# Altium PCB 14语音模块OK.PcbDoc
Units mil, origin at the board's own origin, x right, y up, seen from the top; angles counter-clockwise.
Board outline 1168.96 x 939.54 mil, 2 copper layers (Top Layer, Bottom Layer); 3 components, 11 nets, 24 pads, 21 vias.
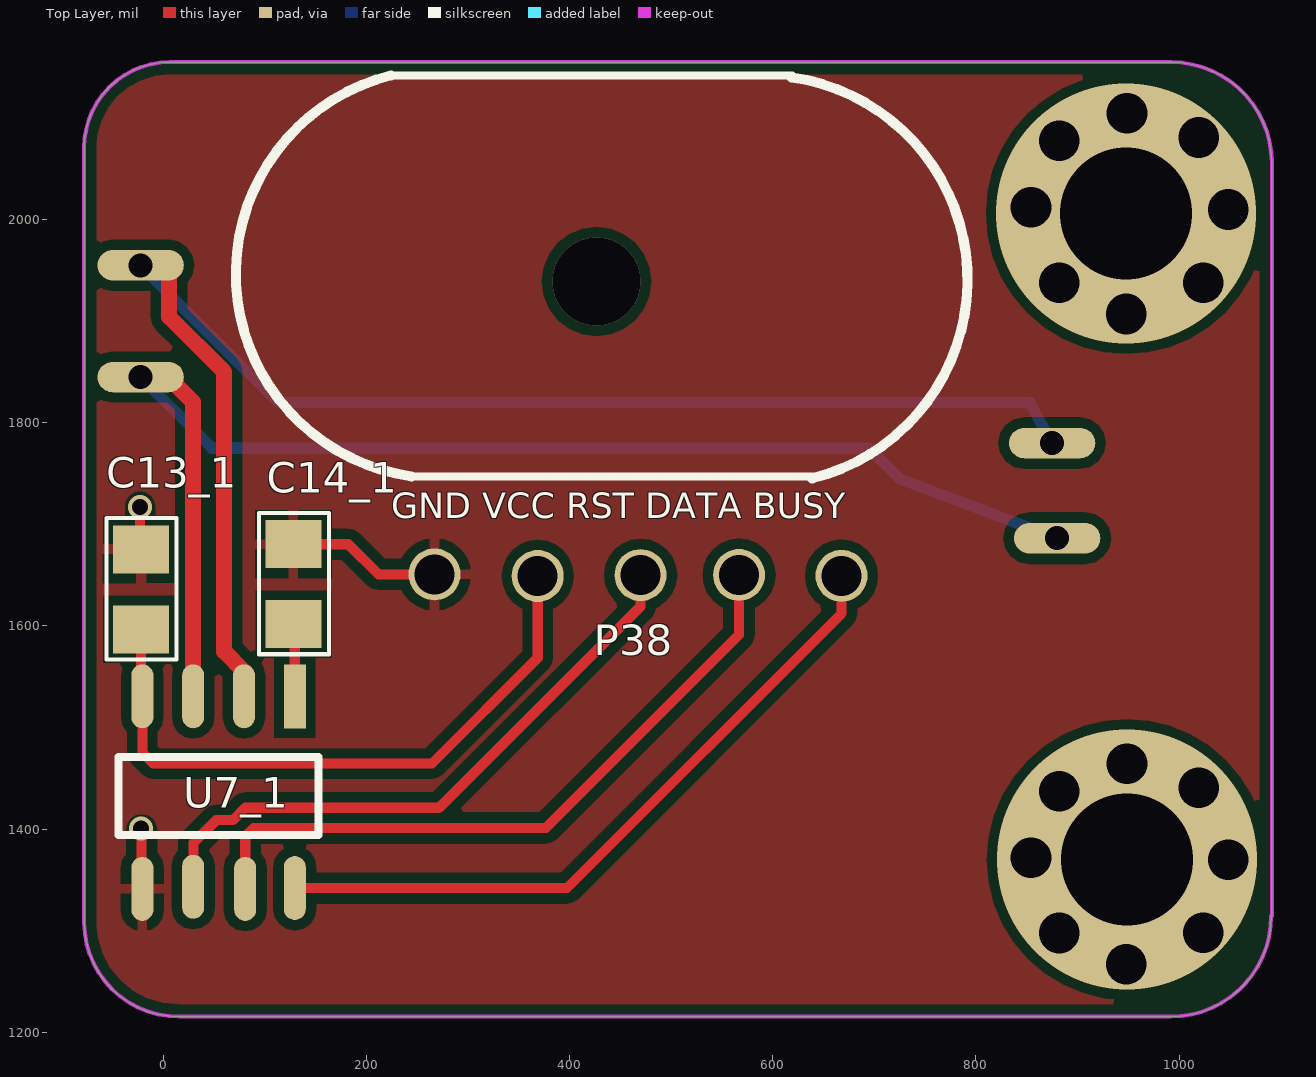
[diagram p0: Top Layer view]
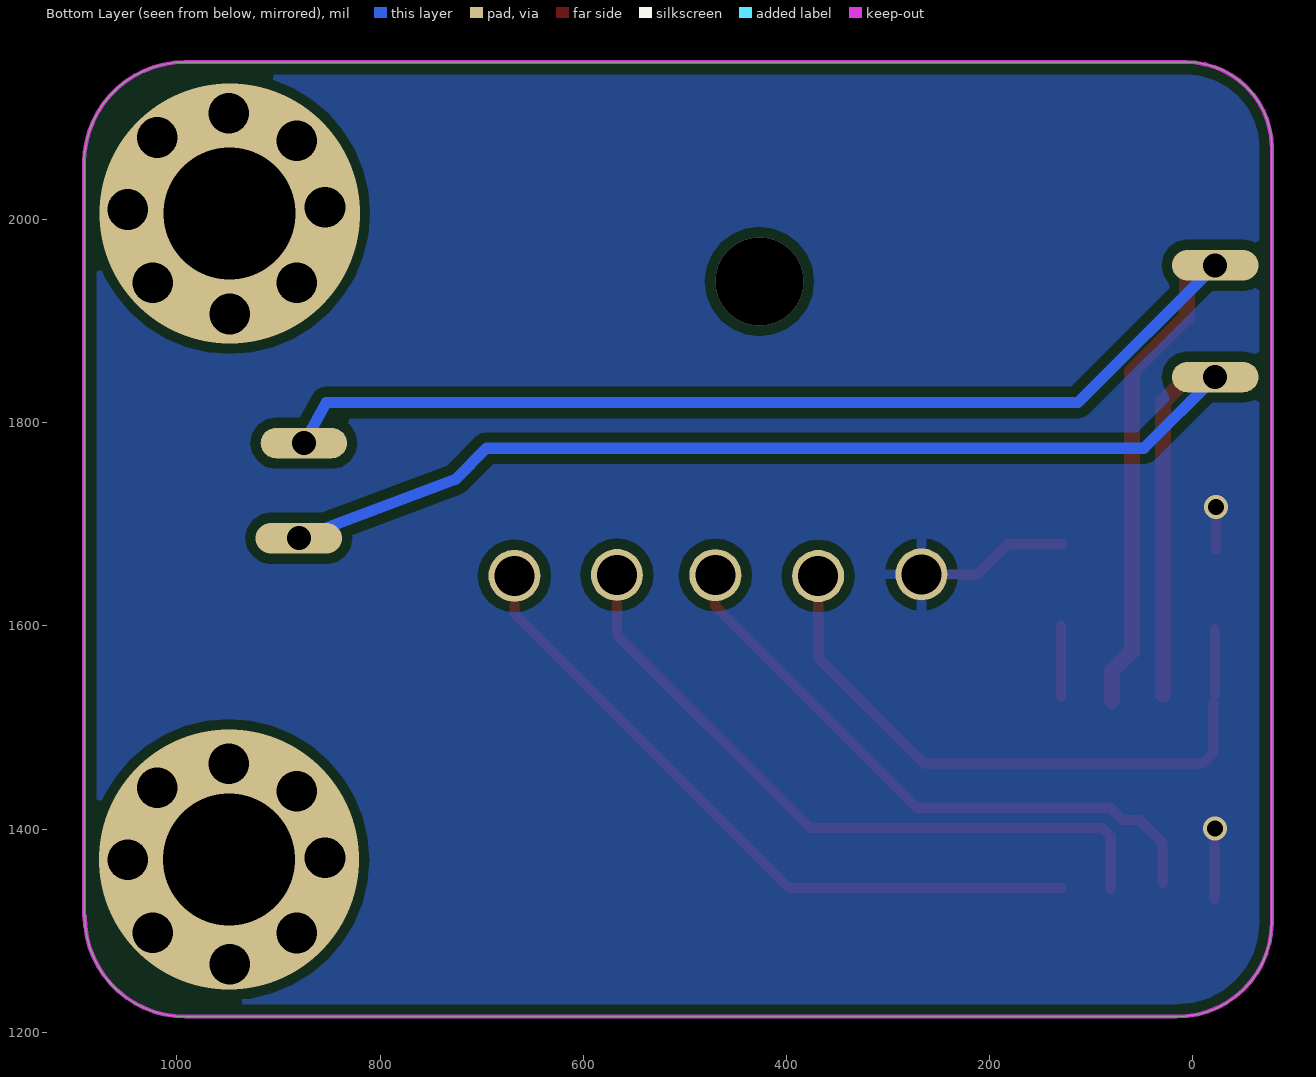
[diagram p1: Bottom Layer view, seen from below]

## Layer stack, top to bottom
Top Solder: solder mask 0.4, Solder Resist, Dk 3.5
Top Layer: signal copper 1.4
Dielectric1: dielectric 12.6, FR-4, Dk 4.8
Bottom Layer: signal copper 1.4
Bottom Solder: solder mask 0.4, Solder Resist, Dk 3.5

## Board outline
-77.72,1308.02 -77.72,2070.64 cw(c6.61,2070.62) 6.63,2154.95 992.07,2154.95 cw(c992.07,2055.78) 1091.24,2055.78 1091.24,1314.41 1090.66,1314.41 cw(c991.66,1314.41) 991.66,1215.41 16.1,1215.41 cw(c15.5,1308.63)

## Design rules (kind name [scope] priority, off if disabled: settings)
Clearance CAM_Clearance_2 [OnLayer('Top Layer')] p1: gap=10 ignorepadtopadclearanceinfootprint=FALSE except(0: Arc-Hole Track-Hole SMDPad-Hole THPad-Hole Via-Hole Fill-Hole Poly-Hole Region-Hole Text-Hole)
Clearance CAM_Clearance_1 [OnLayer('Bottom Layer')] p2: gap=10 ignorepadtopadclearanceinfootprint=FALSE except(0: Arc-Hole Track-Hole SMDPad-Hole THPad-Hole Via-Hole Fill-Hole Poly-Hole Region-Hole Text-Hole)
Clearance [All] p3: gap=10 ignorepadtopadclearanceinfootprint=FALSE except(0: Arc-Hole Track-Hole SMDPad-Hole THPad-Hole Via-Hole Fill-Hole Poly-Hole Region-Hole Text-Hole)
PolygonConnect PolygonConnect_1 [isvia] p1: connectstyle=Direct reliefconductorwidth=10 reliefentries=4 polygonreliefangle="90 Angle" airgapwidth=10
PolygonConnect [All] p2: connectstyle=Relief reliefconductorwidth=10 reliefentries=4 polygonreliefangle="90 Angle" airgapwidth=10
RoutingVias [All] p1: holewidth=28 width=50 viastyle="Through Hole" minholewidth=28 minwidth=50 maxholewidth=28 maxwidth=50
SilkToSolderMaskClearance SilkscreenOverComponentPads [IsPad] p1: minsilkscreentomaskgap=10 clearancetoexposedcopper=TRUE
SolderMaskExpansion [All] p1: expansion=4
Width CAM_Width_1 [OnLayer('Bottom Layer')] p1: maxlimit=11 minlimit=4 preferedwidth=5
Width [All] p2: maxlimit=20 minlimit=10 preferedwidth=10
29 further rules are at their usual default settings.

## Components (designator, comment, footprint, x,y, rotation, side; value= is the part's Value field where it differs from the comment)
C13_1 "104 50V 10%" 0805-R -21.77,1636.13 r270 top
C14_1 "104 50V 10%" 0805-R 128.23,1641.13 r270 top
U7_1 "丝印打磨" sop8 54.6,1436.02 r270 top

## Footprints (in the part's own frame and the unit in brackets; to place one, negate y for a bottom-side part, rotate by r counter-clockwise, add the part's x,y. Pads: shape width x height; smd on the part's side, far side on the other; paste and mask are expansions set on the pad)
0805-R [mm]
  rect 1.2x1.4 smd: 1(-1,0) 2(1,0)
  silkscreen extent -1.78,-0.86 1.75,0.89, body extent -0.97,-0.61 1.03,0.64, height 0.55
sop8 [mil]
  rect 62.99x21.65 smd paste+0 mask+4: 1(-94.8,74.99)
  oval 62.99x21.65 smd paste+0 mask+4: 1(-94.8,-25.01) 1(-94.8,24.99) 1(-94.8,-75.01) 1(92.73,-24.99) 1(93.98,75.01) 1(94.8,26.25) 1(94.8,-75)
  silkscreen extent -35,-98 42,98

## Free pads (board coordinates)
  oval 21.65x62.99 smd paste+0 mask+4: 1(29.6,1530.82) 1(79.6,1530.82)
  rect 21.65x62.99 smd paste+0 mask+4: 1(129.6,1530.82)
  round 51.18 hole 39.37: 1(267.1,1650.82) 1(368.75,1649.17) 1(470,1650) 1(566.87,1650.2) 1(667.71,1649.38)
  oval 85x30 hole 23.62: 2(-22.06,1845) 2(-22.06,1955) 2(875,1780) 2(880,1686.41)

## Via types
v1: diameter 40, hole 40, Top Layer to Bottom Layer, 16 vias
v2: diameter 23.62, hole 15.75, Top Layer to Bottom Layer, 2 vias
v3: diameter 255.91, hole 129.92, Top Layer to Bottom Layer, 2 vias
v4: diameter 86.61, hole 86.61, Top Layer to Bottom Layer, 1 vias

## Nets (pads, with @x,y where several pads share a name; then routed paths per layer and width w, separated by ;. In a path a pad name is that pad's centre, name@x,y a point inside that pad or via, vN(x,y) a via of type N, cw(c..) or ccw(c..) an arc to the next point about the centre after c; other vN are vias at no path point)
$Net1: pad.1@29.6,1530.82 pad.2@880,1686.41 pad.2@-22.06,1845 U7_1.1@29.6,1530.82 | length 1284.1
  Top Layer w15.75: pad.2@0,1850 29.6,1820.4 U7_1.1@29.6,1532.47
  Bottom Layer w11: pad.2@-22.06,1845 47.94,1775 695,1775 725.79,1744.21 pad.2@880,1686.41
$Net2: pad.1@79.6,1530.82 pad.2@875,1780 pad.2@-22.06,1955 U7_1.1@79.6,1530.82 | length 1434.7
  Top Layer w15.75: pad.2@5.82,1954.18 5.82,1904.18 60,1850 60,1575 79.6,1555.4 79.6,1530.82 U7_1.1@79.6,1526.64
  Bottom Layer w11: pad.2@-22.06,1955 112.94,1820 852.94,1820 pad.2@875,1780
$Net3: C13_1.2 pad.1@368.75,1649.17 U7_1.1@-20.4,1530.82 | length 630.2
  Top Layer w10: U7_1.1@-21.77,1532.19 C13_1.2 ; U7_1.1@-20.4,1523.63 -20.4,1475.18 -9.77,1464.55 264.6,1464.55 368.75,1568.7 pad.1@368.75,1649.17
$Net4: pad.1@470,1650 U7_1.1@29.61,1343.29 | length 606.6
  Top Layer w10: U7_1.1@29.98,1347.04 29.98,1386.71 52.2,1408.93 68.78,1408.93 80.98,1421.13 271.66,1421.13 470,1619.47 pad.1@470,1650
$Net5: pad.1@566.87,1650.2 U7_1.1@80.85,1341.22 | length 678.6
  Top Layer w10: U7_1.1@80.85,1341.22 80.85,1392.71 89.27,1401.13 376.66,1401.13 566.87,1591.34 pad.1@566.87,1650.2
$Net6: pad.1@667.71,1649.38 U7_1.1@129.61,1342.04 | length 687.2
  Top Layer w10: U7_1.1@129.61,1342.04 397.57,1342.04 667.71,1612.18 pad.1@667.71,1649.38
$Net7: 
  other v1: 947.92,1267.04 882.08,1297.86 1023.74,1297.87 1048.33,1369.96 854.17,1372.04 882.08,1437.46 1019.17,1440.79 948.74,1464.55
  other v3: 948.74,1369.96
$Net8: 
$Net9: 
  other v4: 426.67,1939.13
$Net10: C14_1.2 pad.1@129.6,1530.82 U7_1.1@129.6,1530.82 | length 69.6
  Top Layer w10: U7_1.1@129.6,1530.82 C14_1.2@129.6,1600.39
GND: C13_1.1 C14_1.1 pad.1@267.1,1650.82 U7_1.1@-20.4,1341.22 | length 261.9
  Top Layer w10: C13_1.1@-22.69,1675.5 v2@-22.69,1717.49 ; U7_1.1@-21.2,1330.84 v2@-21.2,1399.57 ; C14_1.1 182.29,1680.5 211.97,1650.82 pad.1@267.1,1650.82
  other v2: -21.64,1400.83 -22.89,1717.08
copper on no net:
  other v1: 947.92,1907.04 882.08,1937.86 1023.74,1937.87 1048.33,2009.96 854.17,2012.04 882.08,2077.46 1019.17,2080.79 948.74,2104.55
  other v3: 947.92,2006.13

## Polygon pours and split planes (outlines as drawn)
GND on Top Layer "Top Layer-No Net" (solid, pour order 8): -77.72,1308.02 -77.72,2070.64 cw(c6.61,2070.62) 6.63,2154.95 992.07,2154.95 cw(c992.07,2055.78) 1091.24,2055.78 1091.24,1314.41 1090.66,1314.41 cw(c991.66,1314.41) 991.66,1215.41 16.1,1215.41 cw(c15.5,1308.63)
GND on Bottom Layer "Top Layer-No Net1" (solid, pour order 9): -77.72,1308.02 -77.72,2070.64 cw(c6.61,2070.62) 6.63,2154.95 992.07,2154.95 cw(c992.07,2055.78) 1091.24,2055.78 1091.24,1314.41 1090.66,1314.41 cw(c991.66,1314.41) 991.66,1215.41 16.1,1215.41 cw(c15.5,1308.63)

## Keep-outs
Keep-Out Layer:
  lines w3.94: -77.72,1308.02 -77.72,2070.64 ; 6.63,2154.95 992.07,2154.95 ; 16.1,1215.41 991.66,1215.41 ; 1091.24,1314.41 1091.24,2055.78
  lines w4: -77.72,1308.02 ccw(c15.5,1308.63) 16.1,1215.41 ; -77.72,2070.64 cw(c6.61,2070.62) 6.63,2154.95 ; 991.66,1215.41 ccw(c991.66,1314.41) 1090.66,1314.41 ; 992.07,2154.95 cw(c992.07,2055.78) 1091.24,2055.78

## Silkscreen, mask and mechanical layers (free items; w line width, h text height)
Top Overlay:
  lines w7.87: 224.4,2141.96 619.01,2141.96 ; 244.6,1747.27 639.21,1747.27
  lines w10: 224.4,2141.96 ccw(c272.89,1946.58) 244.6,1747.27 ; 618.72,2139.99 cw(c590.43,1940.68) 638.92,1745.3
  text "GND VCC RST DATA BUSY" at 224.4,1706.13 h25
  text "P38" at 423.91,1571.13 h30